# Altium PCB MotorDriver.PcbDoc
Units mm, origin at the board's own origin, x right, y up, seen from the top; angles counter-clockwise.
Board outline 28 x 14.3 mm, 2 copper layers (Top Layer, Bottom Layer); 14 components, 12 nets, 62 pads, 6 vias.
Unrouted connection lines stored in the file: 1.
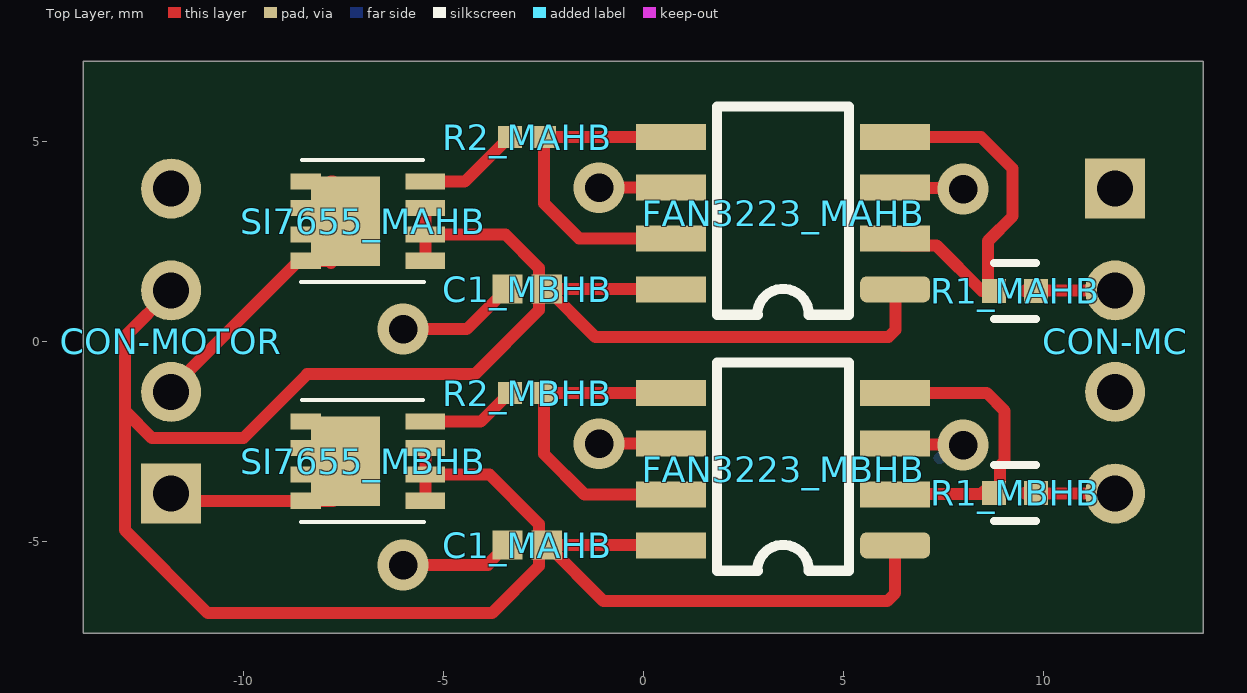
[diagram p0: Top Layer view]
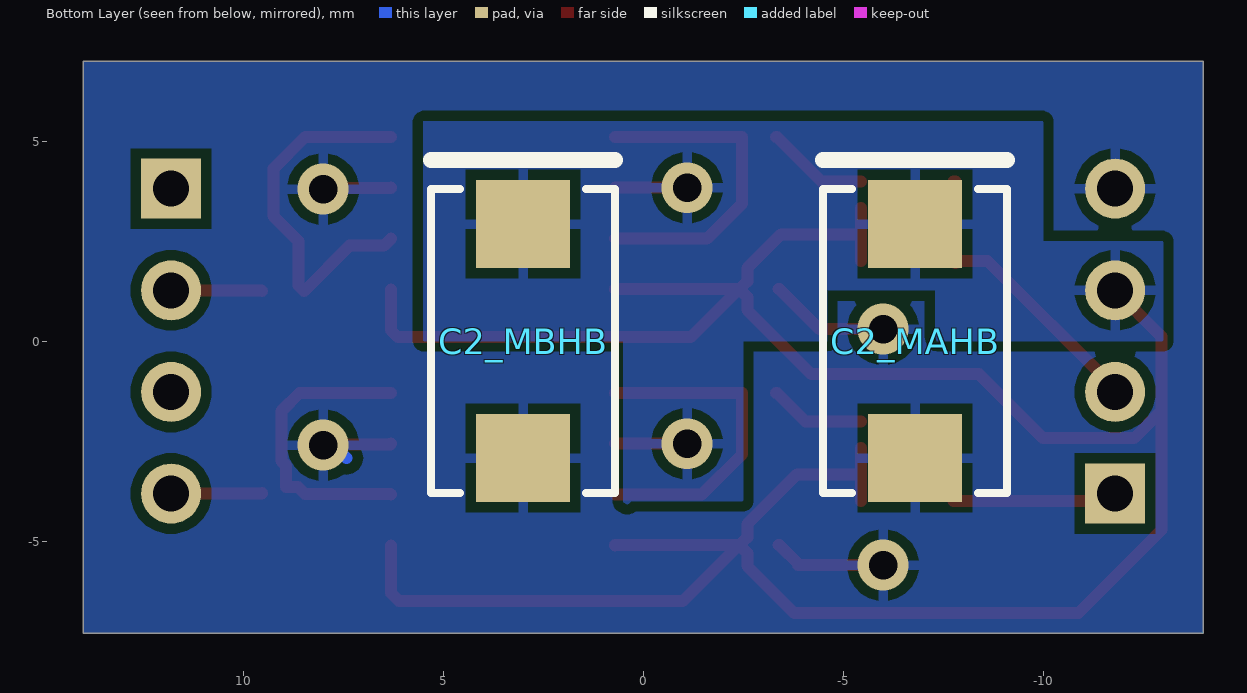
[diagram p1: Bottom Layer view, seen from below]
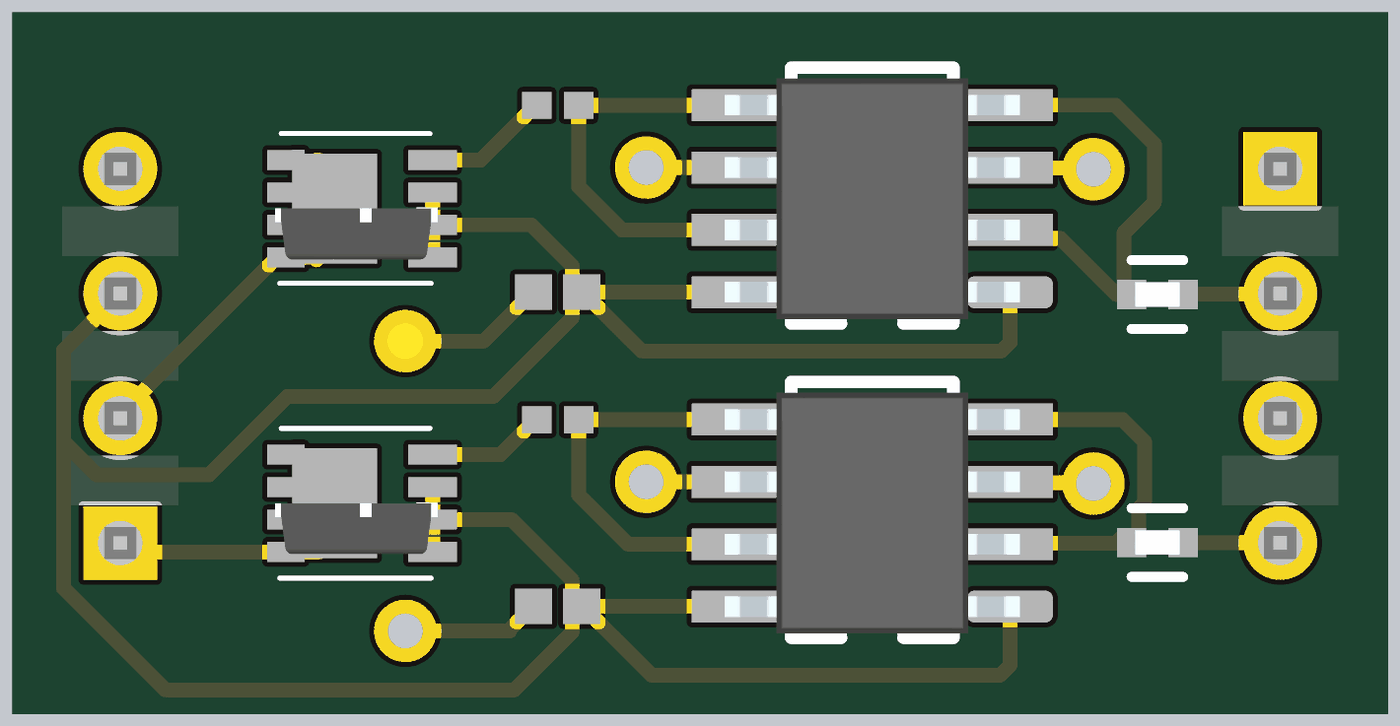
[diagram p2: 3D render of the assembled board from above, using the file's embedded part models]

## Layer stack, top to bottom
Top Solder: solder mask 0.0102, Solder Resist, Dk 3.5
Top Layer: signal copper 0.0356
Dielectric 1: dielectric 0.32, FR-4, Dk 4.8
Bottom Layer: signal copper 0.0356
Bottom Solder: solder mask 0.0102, Solder Resist, Dk 3.5

## Board outline
-14,-7.3 14,-7.3 14,7 -14,7

## Design rules (kind name [scope] priority, off if disabled: settings)
Clearance [All] p1: gap=0.254 ignorepadtopadclearanceinfootprint=TRUE except(0: Arc-Hole Track-Hole SMDPad-Hole THPad-Hole Via-Hole Fill-Hole Poly-Hole Region-Hole Text-Hole; 0.2: SMDPad-THPad)
ComponentClearance [InPolygon vs InPolygon] p1: gap=0.254 collisioncheckmode=3 verticalgap=0.05 showdistances=FALSE
PolygonConnect "Schematic Polygon Connect Style_1" [InNet('MAOUT')] p1: connectstyle=Direct reliefconductorwidth=0.254 reliefentries=4 polygonreliefangle="45 Angle" airgapwidth=0.254
PolygonConnect "Schematic Polygon Connect Style" [InNet('MBOUT')] p2: connectstyle=Direct reliefconductorwidth=0.254 reliefentries=4 polygonreliefangle="45 Angle" airgapwidth=0.254
PolygonConnect [All] p3: connectstyle=Relief reliefconductorwidth=0.254 reliefentries=4 polygonreliefangle="90 Angle" airgapwidth=0.254
RoutingVias [All] p1: holewidth=0.711 width=1.27 viastyle="Through Hole" minholewidth=0.711 minwidth=1.27 maxholewidth=0.711 maxwidth=1.27
SolderMaskExpansion [All] p1: expansion=0.102 istentingtop=FALSE
Width [All] p1: maxlimit=0.3 minlimit=0.3 preferedwidth=0.3 minimp=50.000000 maximp=50.000000 favimp=50.000000
29 further rules are at their usual default settings.

## Classes and differential pairs
channel class Half_Bridge: MAHB MBHB
component class Motor_Driver: CON-MC CON-MOTOR
component class MBHB: C1_MBHB C2_MBHB FAN3223_MBHB R1_MBHB R2_MBHB SI7655_MBHB
component class MAHB: C1_MAHB C2_MAHB FAN3223_MAHB R1_MAHB R2_MAHB SI7655_MAHB

## Components (designator, comment, footprint, x,y, rotation, side; value= is the part's Value field where it differs from the comment)
C1_MAHB "CL05B104KO5NNNC" CAPC1050X55X23ML05T13 -2.9,-5.1 r0 top (schematic designator C1)
C1_MBHB "CL05B104KO5NNNC" CAPC1050X55X23ML05T13 -2.9,1.3 r0 top (schematic designator C1)
C2_MAHB "T491D475M050AT" KEMT-T491-D_L -6.8,0 r270 bottom locked (schematic designator C2)
C2_MBHB "T491D475M050AT" KEMT-T491-D_L 3,0 r270 bottom (schematic designator C2)
CON-MC "22032041" 04x01_Conector_Male 11.8,0 r90 top locked
CON-MOTOR "22032041" 04x01_Conector_Male -11.8,0 r270 top
FAN3223_MAHB "Gate Driver P Channel Mosfet" FAN3223 3.5,3.2 r180 top locked value=FAN3223 (schematic designator FAN3223)
FAN3223_MBHB "Gate Driver P Channel Mosfet" FAN3223 3.5,-3.2 r180 top locked value=FAN3223 (schematic designator FAN3223)
R1_MAHB "CRCW0402330RFKED" FP-CRCW0402-e3-MFG 9.3,1.25 r180 top (schematic designator R1)
R1_MBHB "CRCW0402330RFKED" FP-CRCW0402-e3-MFG 9.3,-3.8 r180 top (schematic designator R1)
R2_MAHB "CRCW040210R0FKEDHP" RESC1005X40X25NL05T10 -2.9,5.1 r180 top (schematic designator R2)
R2_MBHB "CRCW040210R0FKEDHP" RESC1005X40X25NL05T10 -2.9,-1.3 r180 top (schematic designator R2)
SI7655_MAHB "SI7655DN-T1-GE3" SIS862DNT1GE3 -7,3 r180 top (schematic designator SI7655)
SI7655_MBHB "SI7655DN-T1-GE3" SIS862DNT1GE3 -7,-3 r180 top locked (schematic designator SI7655)

## Footprints (in the part's own frame and the unit in brackets; to place one, negate y for a bottom-side part, rotate by r counter-clockwise, add the part's x,y. Pads: shape width x height; smd on the part's side, far side on the other; paste and mask are expansions set on the pad)
04x01_Conector_Male [mm] "0022032041"
  rect 1.5x1.5 hole 0.9: 1(3.81,0)
  round 1.5 hole 0.9: 2(1.27,0) 3(-1.27,0) 4(-3.81,0)
  body extent -4.95,-1.18 4.95,1.18, height 3.38
CAPC1050X55X23ML05T13 [mm] "Chip Capacitor, 2-Leads, Body 1.05x0.55mm, IPC Low Density"
  rect 0.76x0.72 smd: 1(-0.49,0) 2(0.49,0)
  body extent -0.53,-0.28 0.53,0.27, height 0.55
FAN3223 [mm] "Gate Driver P Channel"
  rrect50% 1.75x0.65 smd: 1(-2.8,1.905)
  rect 1.75x0.65 smd: 2(-2.8,0.635) 3(-2.8,-0.635) 4(-2.8,-1.905) 5(2.8,1.905) 6(2.8,0.635) 7(2.8,-0.635) 8(2.8,-1.905)
  silkscreen extent -1.65,-2.67 1.65,2.54, body extent -3,-2.45 3,2.45, height 1.75
FP-CRCW0402-e3-MFG [mm]
  rect 0.6x0.6 smd paste+0 mask+0: 1(-0.525,0) 2(0.525,0)
  silkscreen extent -0.53,-0.7 0.53,0.7, body extent -0.92,-0.4 0.92,0.4, height 0.25
KEMT-T491-D_L [mm] "Molded Capacitor, 2-Leads, Body 7.60x4.60mm, IPC High Density"
  rect 2.2x2.35 smd: 1(-2.925,0) 2(2.925,0)
  silkscreen extent -4.52,-2.3 3.8,2.3, body extent -3.8,-2.3 3.8,2.3, height 3.1
RESC1005X40X25NL05T10 [mm] "Chip Resistor, 2-Leads, Body 1.00x0.50mm, IPC Medium Density"
  rect 0.6x0.55 smd: 1(-0.425,0) 2(0.425,0)
  body extent -0.53,-0.27 0.53,0.28, height 0.4
SIS862DNT1GE3 [mm]
  rect 0.99x0.405 smd: 1(-1.555,0.992) 2(-1.555,0.332) 3(-1.555,-0.328) 4(-1.555,-0.988)
  rect 0.51x0.405 smd: 5(1.555,-0.988) 6(1.555,-0.328) 7(1.555,0.332) 8(1.555,0.992)
  rect 1.725x2.235 smd: 9(0.438,0.002)
  rect 0.25x0.077 smd: 10(1.175,-1.156) 11(1.175,1.156)
  silkscreen extent -1.53,-1.53 1.56,1.53, body extent -1.66,-0.02 1.66,1.04, height 1.65

## Part data
C1_MAHB C1_MBHB: library part CMP-2000-05439-1, "Chip Capacitor, 100 nF, +/- 10%, 16 V, -55 to 125 degC, 0402 (1005 Metric), RoHS, Tape and Reel", Capacitance=100000pF, Case Size/Dimension=0402, Dielectric=X7R, Manufacturer="Samsung Electro-Mechanics", Rated Voltage=16V, Tolerance (%)=±10%, Datasheet URL=https://datasheet.ciiva.com/29198/458718-da-01-en-vs-kondensator-0402-29198423.pdf, Datasheet Version=Nov-10, Manufacturer URL=http://www.samsungsem.com/global/index.jsp
C2_MAHB C2_MBHB: library part CMP-2000-07203-1, "Tantalum Surface Mount Capacitor, 4.7 uF, +/- 20%, 50 V, -55 to 125 degC, 2-Pin SMD, RoHS, Tape and Reel", Capacitance=4700000pF, Case Code=D, Case Style=Molded, Manufacturer=Kemet, Operating Temp Range=-55Cto125C, Package / Case=7343-31, Package Description="2-Pin Surface Mount Device, Body 7.3 x 4.3 mm", Package Reference=T491-D, Tolerance (+ or -)=20%, Voltage=50VDC, Construction=SMTChip, Datasheet URL=http://www.kemet.com/Lists/ProductCatalog/Attachments/254/KEM_T2005_T491.pdf, Datasheet Version=06/2016, DCL=2.4uA, DF=6%, ESR=1.4ohm, Failure Rate=NotRequired, Insulation=NotRequired, Lead Spacing (nom)=NotRequiredmm, Length W/Weld=NotRequiredmm, Length W/Weld (max)=NotRequiredmm, Manufacturer URL=http://www.kemet.com/, Mounting Style=SurfaceMount, Mounting Technology=SurfaceMount, Packaging=TapeandReel, Polarity=Polar, Product Depth (mm)=4.3mm, Product Diameter (mm)=NotRequiredmm, Product Height (mm)=2.8mm, Product Length (mm)=7.3mm, Rad Hardened=No, Seal=NotRequired, Seated Plane Height=NotRequiredmm, Wire Form=NotRequired
CON-MC CON-MOTOR: library part 04x01_Conector_Male-SCH, "CONN HEADER 4POS .100 VERT TIN"
FAN3223_MAHB FAN3223_MBHB: library part FAN3223, ComponentLink1Description="New link"
R1_MAHB R1_MBHB: library part CMP-2002-08523-2, "RES Thick Film, 330Ω, 1%, 0.063W, 100ppm/°C, 0402", Case Code (Imperial)=0402, Case Code (Metric)=1005, Max Operating Temperature=155°C, Max Power Dissipation=63mW, Min Operating Temperature=-55°C, Package Quantity=10, Resistance=330R, Temperature Coefficient=100ppm/°C, Tolerance=1%, Voltage Rating=50V, Case/Package=0402, Composition="Thick Film", Contact Plating=Tin, Depth=0.5mm, Features="Automotive AEC-Q200", Height=0.35mm, Lead Free="Lead Free", Length=1mm, Military Standard=Not, Number of Terminations=2, Packaging="Tape and Reel", Power Rating=63mW, Radiation Hardening=No, Termination=SMD/SMT, Voltage Rating (DC)=50V, Weight=2.3E-05oz, Width=0.5mm
R2_MAHB R2_MBHB: library part CMP-2002-03046-1, Manufacturer="Vishay Dale", Part Number=CRCW040210R0FKEDHP
SI7655_MAHB SI7655_MBHB: "MOSFET (P-Channel)", Manufacturer_Name=Vishay, Mouser Part Number=78-SI7655DN-T1-GE3, Arrow Part Number=SI7655DN-T1-GE3, Arrow Price/Stock=https://www.arrow.com/en/products/si7655dn-t1-ge3/vishay, Datasheet Link=https://www.vishay.com/docs/63617/si7655dn.pdf, Manufacturer_Part_Number=SI7655DN-T1-GE3, Mouser Price/Stock=https://www.mouser.co.uk/ProductDetail/Vishay-Semiconductors/SI7655DN-T1-GE3?qs=8YL4b%2FT9KqrUzqvG%2FOmMqw%3D%3D

## Via types
v1: diameter 1.27, hole 0.711, Top Layer to Bottom Layer, 6 vias

## Nets (pads, with @x,y where several pads share a name; then routed paths per layer and width w, separated by ;. In a path a pad name is that pad's centre, name@x,y a point inside that pad or via, vN(x,y) a via of type N, cw(c..) or ccw(c..) an arc to the next point about the centre after c; other vN are vias at no path point)
GND: C1_MAHB.1 C1_MBHB.1 C2_MAHB.2 C2_MBHB.2 CON-MOTOR.4 FAN3223_MAHB.3 FAN3223_MBHB.3 | length 10.1
  Top Layer w0.3: v1(-6,-5.6) -3.874,-5.6 -3.874,-5.564 -3.41,-5.1 C1_MAHB.1 ; v1(-6,0.3) -4.41,0.3 -3.41,1.3 C1_MBHB.1 ; FAN3223_MBHB.3 6.317,-2.582 7.982,-2.582 v1(8,-2.6) ; FAN3223_MAHB.3 6.307,3.828 8.072,3.828 v1@8.079,3.821
  Bottom Layer w0.3: 7.413,-2.925 7.738,-2.6 v1(8,-2.6)
  other v1: 8,3.8
MAIN: CON-MC.2 R1_MAHB.1 | length 2.3
  Top Layer w0.3: R1_MAHB.1@9.525,1.25 9.535,1.26 11.79,1.26 CON-MC.2
MAOUT: CON-MOTOR.2 SI7655_MAHB.5 SI7655_MAHB.6 SI7655_MAHB.7 SI7655_MAHB.8 SI7655_MAHB.9 SI7655_MAHB.10 SI7655_MAHB.11 | length 5.7
  Top Layer w0.3: CON-MOTOR.2 -11.8,-1.184 -8.608,2.008 SI7655_MAHB.8 -7.755,2.008 SI7655_MAHB.9@-7.808,1.955 ; SI7655_MAHB.9@-7.808,2.668 SI7655_MAHB.9@-7.755,2.668 ; SI7655_MAHB.9@-7.808,3.328 SI7655_MAHB.9@-7.755,3.328 ; SI7655_MAHB.9@-7.808,3.988 SI7655_MAHB.9@-7.755,3.988
MBIN: CON-MC.4 R1_MBHB.1 | length 2.3
  Top Layer w0.3: R1_MBHB.1@9.525,-3.8 9.53,-3.805 11.795,-3.805 CON-MC.4
MBOUT: CON-MOTOR.1 SI7655_MBHB.5 SI7655_MBHB.6 SI7655_MBHB.7 SI7655_MBHB.8 SI7655_MBHB.9 SI7655_MBHB.11 | length 4.1
  Top Layer w0.3: CON-MOTOR.1 -11.618,-3.992 SI7655_MBHB.9@-7.755,-3.992
NetFAN3223_MAHB_2: FAN3223_MAHB.2 FAN3223_MAHB.4 R1_MAHB.2 | length 9.4
  Top Layer w0.3: FAN3223_MAHB.2 6.475,2.39 7.335,2.39 8.475,1.25 8.621,1.396 8.621,2.504 9.239,3.122 9.239,4.311 8.445,5.105 FAN3223_MAHB.4
NetFAN3223_MAHB_6: FAN3223_MAHB.6 FAN3223_MAHB.8 R2_MAHB.1 | length 8.4
  Top Layer w0.3: FAN3223_MAHB.6 -1.6,2.565 -2.475,3.44 R2_MAHB.1 -2.472,5.102 0.697,5.102 FAN3223_MAHB.8
NetFAN3223_MBHB_2: FAN3223_MBHB.2 FAN3223_MBHB.4 R1_MBHB.2 | length 7.6
  Top Layer w0.3: FAN3223_MBHB.2 6.318,-3.818 8.457,-3.818 8.625,-3.65 8.925,-3.65 8.925,-3.109 9.039,-2.995 9.039,-1.748 8.586,-1.295 FAN3223_MBHB.4
NetFAN3223_MBHB_6: FAN3223_MBHB.6 FAN3223_MBHB.8 R2_MBHB.1 | length 8.3
  Top Layer w0.3: FAN3223_MBHB.6 -1.465,-3.835 -2.475,-2.825 R2_MBHB.1 -2.472,-1.298 0.698,-1.298 FAN3223_MBHB.8
NetR2_MAHB_2: R2_MAHB.2 SI7655_MAHB.4 | length 2.6
  Top Layer w0.3: SI7655_MAHB.4 -4.462,3.988 -3.35,5.1 R2_MAHB.2
NetR2_MBHB_2: R2_MBHB.2 SI7655_MBHB.4 | length 2.4
  Top Layer w0.3: SI7655_MBHB.4 -4.062,-2.012 -3.35,-1.3 R2_MBHB.2
VCC: C1_MAHB.2 C1_MBHB.2 C2_MAHB.1 C2_MBHB.1 CON-MOTOR.3 FAN3223_MAHB.1 FAN3223_MAHB.5 FAN3223_MAHB.7 FAN3223_MBHB.1 FAN3223_MBHB.5 FAN3223_MBHB.7 SI7655_MAHB.1 SI7655_MAHB.2 SI7655_MAHB.3 SI7655_MBHB.1 SI7655_MBHB.2 SI7655_MBHB.3 | length 72.4
  Top Layer w0.3: CON-MOTOR.3 -12.954,0.116 -12.954,-1.748 ; SI7655_MBHB.1 SI7655_MBHB.2 ; SI7655_MBHB.3 SI7655_MBHB.2 ; SI7655_MAHB.1 SI7655_MAHB.2 ; SI7655_MAHB.3 SI7655_MAHB.2 ; C1_MAHB.2@-2.39,-5.1 C1_MAHB.2@-2.387,-5.102 ; v1@-1.11,-2.565 FAN3223_MBHB.7 ; v1(-1.1,3.835) FAN3223_MAHB.7 ; FAN3223_MBHB.5 0.697,-5.102 C1_MAHB.2@-2.387,-5.102 ; FAN3223_MAHB.5 0.698,1.298 C1_MBHB.2@-2.387,1.298 ; FAN3223_MBHB.1 6.3,-6.3 6.1,-6.5 -0.99,-6.5 C1_MAHB.2@-2.387,-5.102 ; FAN3223_MAHB.1 6.307,1.288 6.307,0.276 6.131,0.1 -1.19,0.1 C1_MBHB.2@-2.387,1.298 ; -12.954,-1.748 -12.954,-4.727 -10.881,-6.8 -3.779,-6.8 -2.606,-5.627 -2.606,-5.296 C1_MAHB.2 -2.606,-4.904 -2.606,-4.573 -3.847,-3.332 SI7655_MBHB.2 ; -12.954,-1.748 -12.278,-2.424 -9.996,-2.424 -8.398,-0.826 -4.204,-0.826 -2.606,0.773 -2.606,1.104 C1_MBHB.2 ; SI7655_MAHB.2 -3.447,2.668 -2.606,1.827 -2.606,1.496 C1_MBHB.2 ; C1_MBHB.2 -2.39,1.3 C1_MBHB.2@-2.387,1.298
  other v1: -1.1,-2.565
pads on no net: CON-MC.1 CON-MC.3 SI7655_MBHB.10

## Polygon pours and split planes (outlines as drawn)
GND on Bottom Layer "GND_L02_P001" (solid, pour order 1): -14,7 -14,-7.3 14,-7.3 14,7
VCC on Bottom Layer "VCC_L02_P000" (solid, pour order 0): -7.2,0 -7.3,0.1 -7.3,1.27 -4.63,1.27 -4.6,1.3 -4.6,0 -2.5,0 -2.5,-4 0.3,-4 0.5,-4.2 0.5,0 5.5,0 5.5,5.5 -10,5.5 -10,2.5 -13,2.5 -13,0